# Altium PCB PnP.PcbDoc (part 4 of 5)
Units mm, origin at the board's own origin, x right, y up, seen from the top; angles counter-clockwise.
Board outline 95 x 65 mm, 6 copper layers (Top Layer, L2 - GND, L3 - PWR, L4 - Sig, L5 - GND, Bottom Layer), stack 1.538 mm thick; 358 components, 260 nets, 1269 pads, 686 vias.
Unrouted connection lines stored in the file: 161.
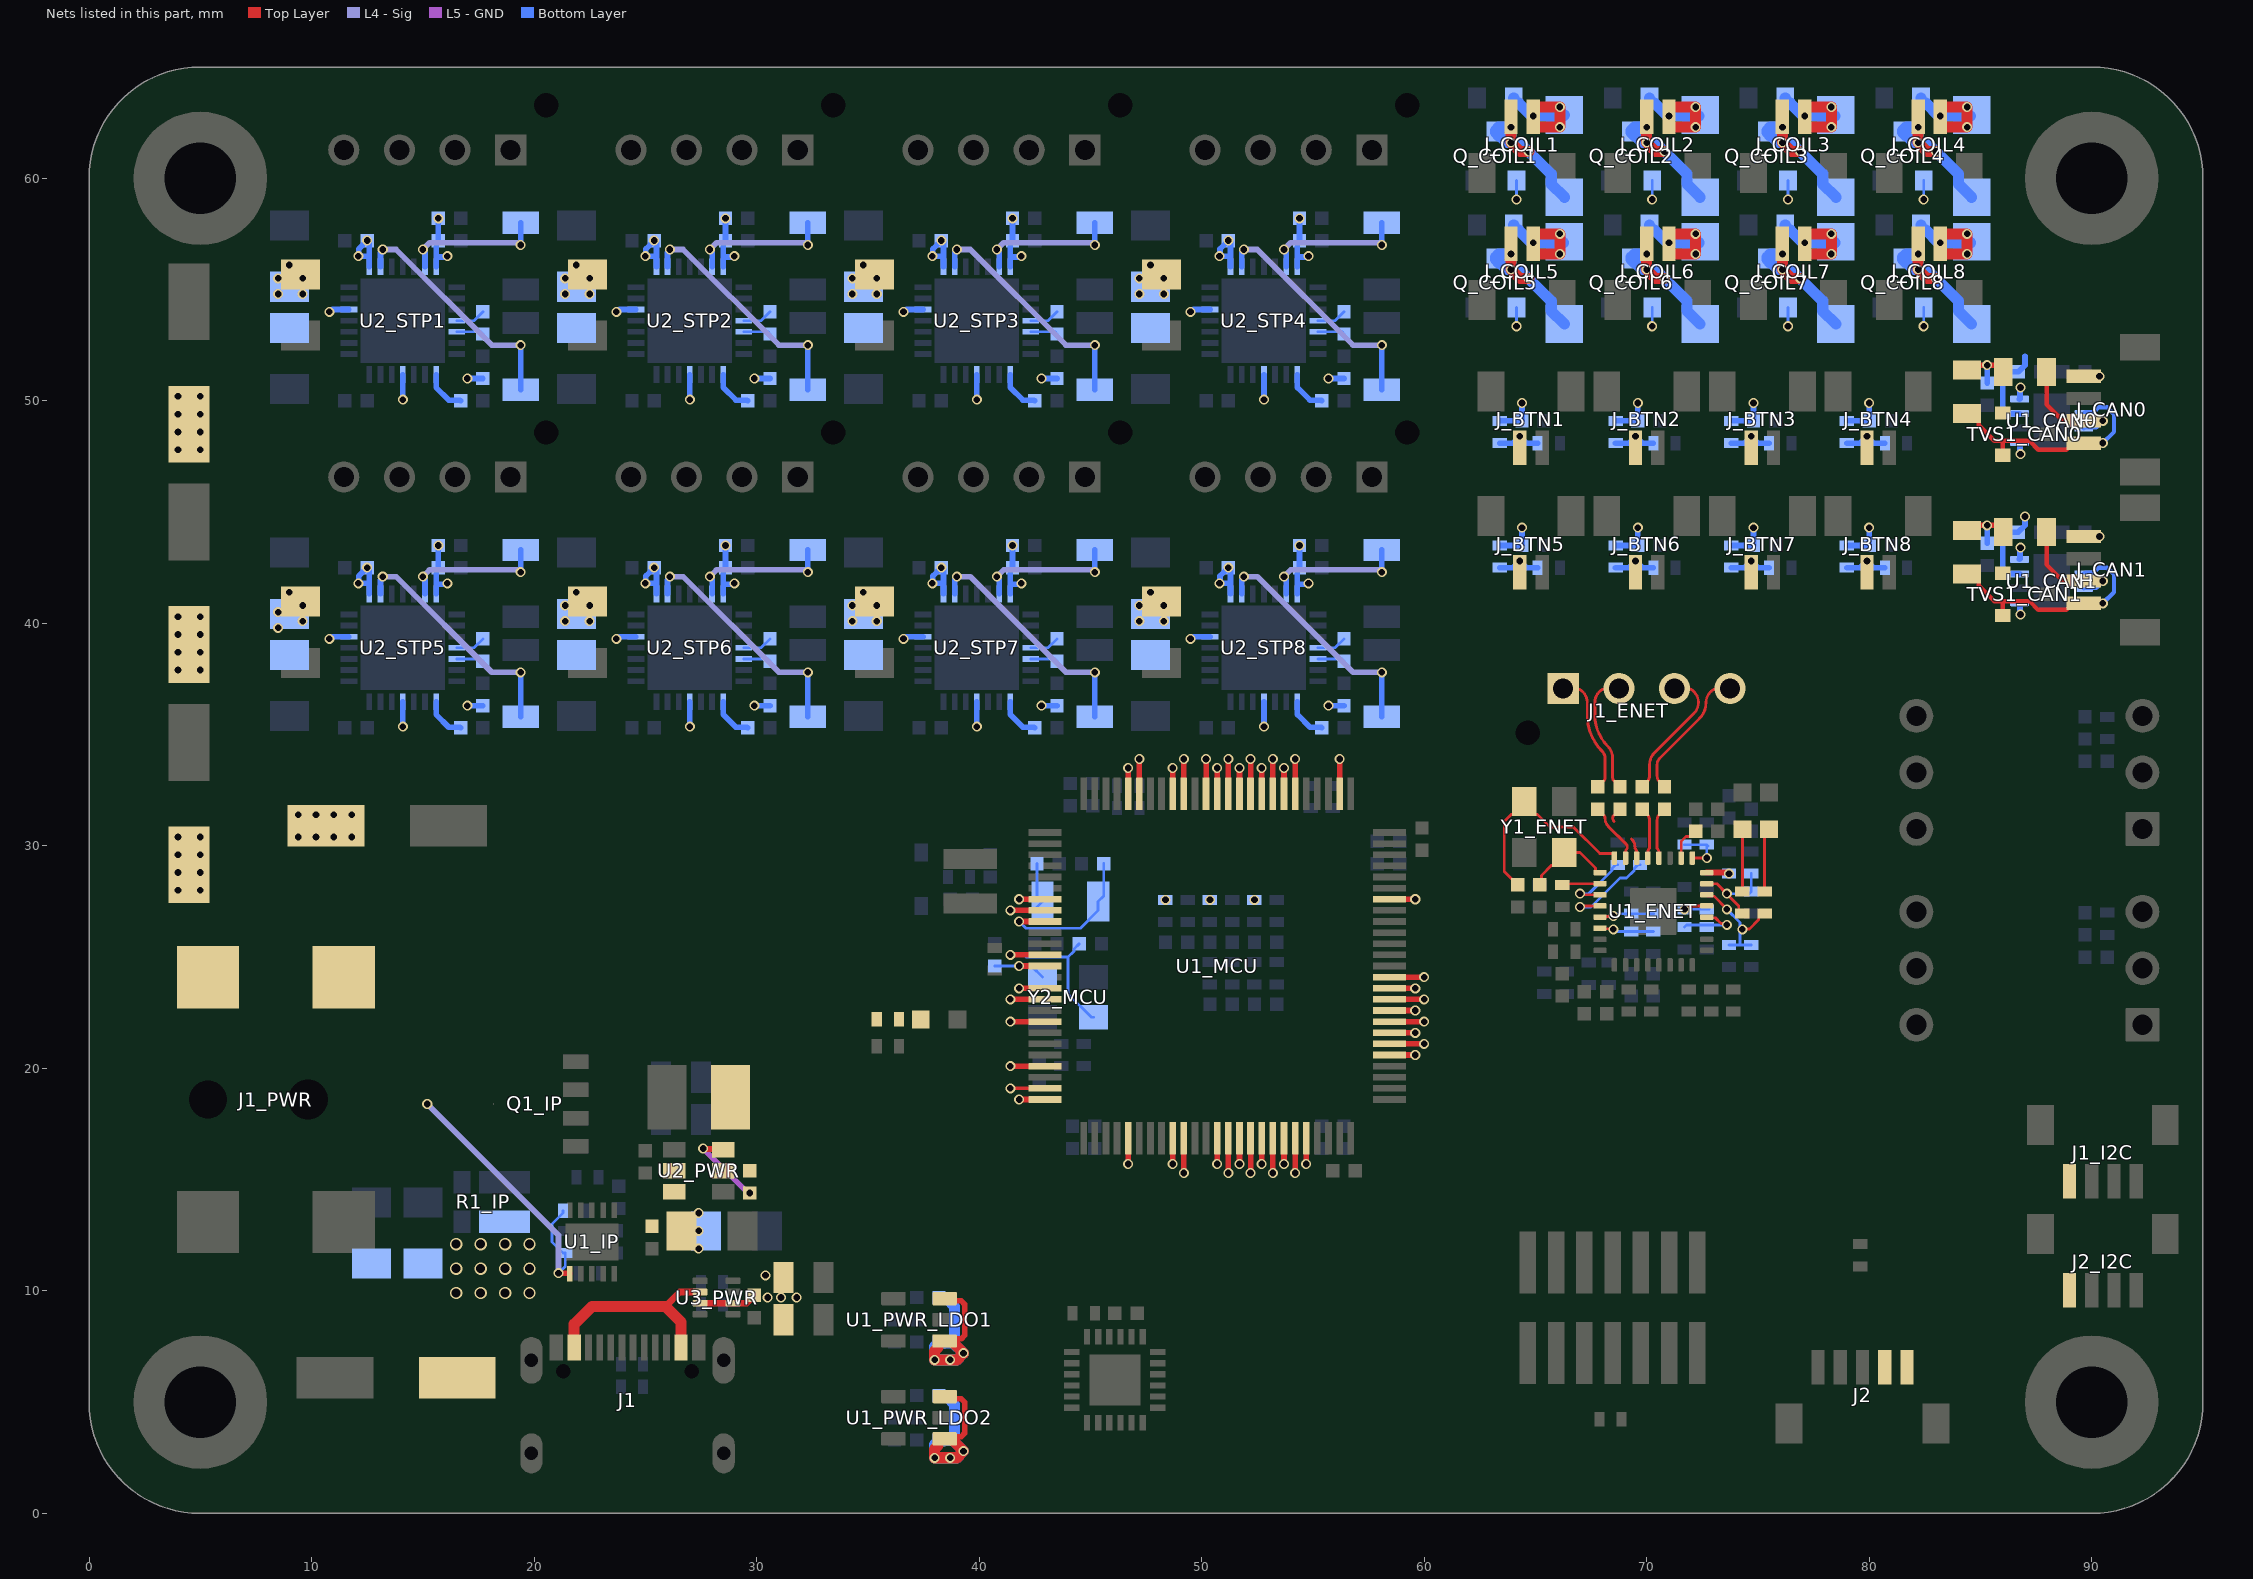
[diagram p7: the nets of this part, all layers, seen from the top]

## Via types
v1: diameter 0.45, hole 0.3, Top Layer to Bottom Layer, tented both sides, 674 vias
v2: diameter 0.55, hole 0.4, Top Layer to Bottom Layer, tented both sides, 12 vias

## Nets (pads, with @x,y where several pads share a name; then routed paths per layer and width w, separated by ;. In a path a pad name is that pad's centre, name@x,y a point inside that pad or via, vN(x,y) a via of type N, cw(c..) or ccw(c..) an arc to the next point about the centre after c; other vN are vias at no path point) (continued)
5V0_LOGIC: C1_PWR_LDO1.2 C1_PWR_LDO2.2 C2_CAN0.1 C2_CAN1.1 C2_PWR_LDO1.2 C2_PWR_LDO2.2 C21_PWR.2 C22_PWR.2 C23_PWR.2 R5_PWR.2 U1_CAN0.3 U1_CAN1.3 U1_PWR_LDO1.1 U1_PWR_LDO1.3 U1_PWR_LDO2.1 U1_PWR_LDO2.3 U3_PWR.2 U3_PWR.7 | length 37
  Top Layer w0.254: U1_PWR_LDO2.1@38.45,3.35 38.551,3.451 39.201,3.451 39.35,3.6 39.35,5 39.201,5.149 38.551,5.149 U1_PWR_LDO2.3@38.45,5.25 ; U1_PWR_LDO1.1@38.45,7.75 38.551,7.851 39.201,7.851 39.35,8 39.35,9.4 39.201,9.549 38.551,9.549 U1_PWR_LDO1.3@38.45,9.65
  Top Layer w0.3: U3_PWR.7@27.46,9.45 U3_PWR.2@28.94,9.45 29.55,9.45 C21_PWR.2@29.9,9.8
  Top Layer w0.5: v1(38,2.5) v1(38.7,2.5) 39,2.5 v1(39.3,2.8) 38.8,3.3 38.5,3.3 U1_PWR_LDO2.1@38.45,3.35 38.2,3.35 38.15,3.3 38.15,3.05 38,2.9 v1(38,2.5) ; v1(38,6.9) 38,7.3 38.15,7.45 38.15,7.7 38.2,7.75 U1_PWR_LDO1.1@38.45,7.75 38.5,7.7 38.8,7.7 v1(39.3,7.2) 39,6.9 v1(38.7,6.9) v1(38,6.9)
  Bottom Layer w0.254: U1_CAN1.3@86.755,42.225 86.149,42.225 86,42.374 86,43.951 86.149,44.1 C2_CAN1.1@86.7,44.1 87,44.4 v1(87,44.8) ; U1_CAN0.3@86.755,49.425 86.149,49.425 86,49.574 86,51.151 86.149,51.3 C2_CAN0.1@86.7,51.3 87,51.6 87,52
  Bottom Layer w0.5: C1_PWR_LDO2.2@38.2,5.3 38.25,5.25 38.55,5.25 38.9,4.9 38.9,3.339 38.83,3.27 ; C2_PWR_LDO1.2@38.2,9.7 38.25,9.65 38.55,9.65 38.9,9.3 38.9,7.739 38.83,7.67 ; 38.83,3.27 v1(39.3,2.8) 39,2.5 v1(38.7,2.5) v1(38,2.5) 38,3.1 C2_PWR_LDO2.2@38.2,3.3 38.23,3.27 38.83,3.27 ; 38.83,7.67 38.23,7.67 C1_PWR_LDO1.2@38.2,7.7 38,7.5 v1(38,6.9) v1(38.7,6.9) 39,6.9 v1(39.3,7.2) 38.83,7.67
  other v1: 30.5,9.7 31.1,9.7 31.8,9.7 30.4,10.7 52.375,27.575
5V0_USB: J1.A4 J1.B4 U3_PWR.6 | length 9.4
  Top Layer w0.3: 25.9,9.3 26.55,9.95 U3_PWR.6@27.46,9.95
  Top Layer w0.5: J1.A4@21.8,7.455 21.8,8.5 22.6,9.3 25.9,9.3 26.6,8.6 J1.B4@26.6,7.455
5VOUT_STP1: C6_STP1.2 U2_STP1.8 | length 1.9
  Bottom Layer w0.254: U2_STP1.8@15.6,51.176 15.6,50.6 16.168,50.032 16.668,50.032 C6_STP1.2@16.7,50
5VOUT_STP2: C6_STP2.2 U2_STP2.8 | length 1.9
  Bottom Layer w0.254: U2_STP2.8@28.5,51.176 28.5,50.6 29.068,50.032 29.568,50.032 C6_STP2.2@29.6,50
5VOUT_STP3: C6_STP3.2 U2_STP3.8 | length 1.9
  Bottom Layer w0.254: U2_STP3.8@41.4,51.176 41.4,50.6 41.968,50.032 42.468,50.032 C6_STP3.2@42.5,50
5VOUT_STP4: C6_STP4.2 U2_STP4.8 | length 1.9
  Bottom Layer w0.254: U2_STP4.8@54.3,51.176 54.3,50.6 54.868,50.032 55.368,50.032 C6_STP4.2@55.4,50
5VOUT_STP5: C6_STP5.2 U2_STP5.8 | length 1.9
  Bottom Layer w0.254: U2_STP5.8@15.6,36.477 15.6,35.9 16.168,35.332 16.668,35.332 C6_STP5.2@16.7,35.3
5VOUT_STP6: C6_STP6.2 U2_STP6.8 | length 1.9
  Bottom Layer w0.254: U2_STP6.8@28.5,36.477 28.5,35.9 29.068,35.332 29.568,35.332 C6_STP6.2@29.6,35.3
5VOUT_STP7: C6_STP7.2 U2_STP7.8 | length 1.9
  Bottom Layer w0.254: U2_STP7.8@41.4,36.477 41.4,35.9 41.968,35.332 42.468,35.332 C6_STP7.2@42.5,35.3
5VOUT_STP8: C6_STP8.2 U2_STP8.8 | length 1.9
  Bottom Layer w0.254: U2_STP8.8@54.3,36.477 54.3,35.9 54.868,35.332 55.368,35.332 C6_STP8.2@55.4,35.3
24V_IN: J1_PWR.1 Q1_IP.5 R1_PWR.2 R2_IP.2 R3_IP.2 U1_IP.1 | length 14
  Top Layer w0.254: v1(21.1,10.8) 21.112,10.787 21.598,10.787 21.6,10.786 U1_IP.1@21.6,10.775
  L4 - Sig w0.254: v1(15.2,18.4) 21.1,12.5 v1(21.1,10.8)
  Bottom Layer w0.127: v1(21.1,10.8) 21.4,11.1 R2_IP.2@21.4,11.7 21.3,11.7 20.8,12.2 20.8,13 21.3,13.5 R3_IP.2@21.3,13.6
  other v1: 48.375,27.575
24V_MAIN: C1_IP.1 C1_STP1.2 C1_STP2.2 C1_STP3.2 C1_STP4.2 C1_STP5.2 C1_STP6.2 C1_STP7.2 C1_STP8.2 C2_IP.2 C2_STP1.2 C2_STP2.2 C2_STP3.2 C2_STP4.2 C2_STP5.2 C2_STP6.2 C2_STP7.2 C2_STP8.2 C3_IP.2 C3_STP1.2 C3_STP2.2 C3_STP3.2 C3_STP4.2 C3_STP5.2 C3_STP6.2 C3_STP7.2 C3_STP8.2 C4_STP1.2 C4_STP2.2 C4_STP3.2 C4_STP4.2 C4_STP5.2 C4_STP6.2 C4_STP7.2 C4_STP8.2 C8_STP1.2 C8_STP2.2 C8_STP3.2 C8_STP4.2 C8_STP5.2 C8_STP6.2 C8_STP7.2 C8_STP8.2 C9_PWR.1 C9_STP1.2 C9_STP2.2 C9_STP3.2 C9_STP4.2 C9_STP5.2 C9_STP6.2 C9_STP7.2 C9_STP8.2 C10_PWR.2 C10_STP1.2 C10_STP2.2 C10_STP3.2 C10_STP4.2 C10_STP5.2 C10_STP6.2 C10_STP7.2 C10_STP8.2 C11_PWR.2 C17_PWR.1 C18_PWR.1 C19_PWR.1 C20_PWR.1 C_COIL1.2 C_COIL2.2 C_COIL3.2 C_COIL4.2 C_COIL5.2 C_COIL6.2 C_COIL7.2 C_COIL8.2 D_COIL1.1 D_COIL2.1 D_COIL3.1 D_COIL4.1 D_COIL5.1 D_COIL6.1 D_COIL7.1 D_COIL8.1 J1_I2C.1 J2_I2C.1 J_CAN0.1 J_CAN1.1 J_COIL1.1 J_COIL2.1 J_COIL3.1 J_COIL4.1 J_COIL5.1 J_COIL6.1 J_COIL7.1 J_COIL8.1 R1_IP.2 R2_PWR.2 U2_PWR.2 U2_PWR.3 U2_STP1.22 U2_STP1.28 U2_STP2.22 U2_STP2.28 U2_STP3.22 U2_STP3.28 U2_STP4.22 U2_STP4.28 U2_STP5.22 U2_STP5.28 U2_STP6.22 U2_STP6.28 U2_STP7.22 U2_STP7.28 U2_STP8.22 U2_STP8.28 | length 102.7
  Top Layer w0.127: J_CAN0.1@89.637,51.1 v1(90.352,51.1)
  Top Layer w0.5: J_COIL5.1@64.9,56.65 J_COIL5.1@64.9,57.063 64.9,57.45 64.95,57.5 v1(66.1,57.5) v1(66.1,56.6) 64.95,56.6 J_COIL5.1@64.9,56.65 ; J_COIL1.1@64.9,62.35 J_COIL1.1@64.9,62.763 64.9,63.15 64.95,63.2 v1(66.1,63.2) v1(66.1,62.3) 64.95,62.3 J_COIL1.1@64.9,62.35 ; J_COIL6.1@71,56.65 J_COIL6.1@71,57.063 71,57.45 71.05,57.5 v1(72.2,57.5) v1(72.2,56.6) 71.05,56.6 J_COIL6.1@71,56.65 ; J_COIL2.1@71,62.35 J_COIL2.1@71,62.762 71,63.15 71.05,63.2 v1(72.2,63.2) v1(72.2,62.3) 71.05,62.3 J_COIL2.1@71,62.35 ; J_COIL7.1@77.1,56.65 J_COIL7.1@77.1,57.063 77.1,57.45 77.15,57.5 v1(78.3,57.5) v1(78.3,56.6) 77.15,56.6 J_COIL7.1@77.1,56.65 ; J_COIL3.1@77.1,62.35 J_COIL3.1@77.1,62.763 77.1,63.15 77.15,63.2 v1(78.3,63.2) v1(78.3,62.3) 77.15,62.3 J_COIL3.1@77.1,62.35 ; J_COIL8.1@83.2,56.65 J_COIL8.1@83.2,57.063 83.2,57.45 83.25,57.5 v1(84.4,57.5) v1(84.4,56.6) 83.25,56.6 J_COIL8.1@83.2,56.65 ; J_COIL4.1@83.2,62.35 J_COIL4.1@83.2,62.763 83.2,63.15 83.25,63.2 v1(84.4,63.2) v1(84.4,62.3) 83.25,62.3 J_COIL4.1@83.2,62.35
  Bottom Layer w0.254: v1(12.1,41.8) 12.6,41.8 ; v1@12.1,41.82 12.125,41.844 12.125,42.125 v1(12.5,42.5) 12.6,42.4 12.6,41.8 ; v1(12.1,56.5) 12.6,56.5 ; v1@12.1,56.52 12.125,56.544 12.125,56.825 v1(12.5,57.2) 12.6,57.1 12.6,56.5 ; U2_STP5.22@12.6,41.323 12.6,41.8 ; U2_STP1.22@12.6,56.023 12.6,56.5 ; U2_STP5.28@15.6,41.323 15.6,41.763 ; U2_STP1.28@15.6,56.023 15.6,56.463 ; v1(15.7,43.5) C2_STP5.2@15.7,42.5 15.6,42.4 15.6,41.763 ; v1(15.7,58.2) C2_STP1.2@15.7,57.2 15.6,57.1 15.6,56.463 ; v1(16.1,41.8) 16.063,41.763 15.6,41.763 ; v1(16.1,56.5) 16.063,56.463 15.6,56.463 ; v1(17,36.3) C4_STP5.2@17.7,36.3 ; v1(17,51) C4_STP1.2@17.7,51 ; v1(25,41.8) 25.5,41.8 ; v1@25,41.82 25.025,41.844 25.025,42.125 v1(25.4,42.5) 25.5,42.4 25.5,41.8 ; v1(25,56.5) 25.5,56.5 ; v1@25,56.52 25.025,56.544 25.025,56.825 v1(25.4,57.2) 25.5,57.1 25.5,56.5 ; U2_STP6.22@25.5,41.323 25.5,41.8 ; U2_STP2.22@25.5,56.023 25.5,56.5 ; U2_STP6.28@28.5,41.323 28.5,41.763 ; U2_STP2.28@28.5,56.023 28.5,56.463 ; v1(28.6,43.5) C2_STP6.2@28.6,42.5 28.5,42.4 28.5,41.763 ; v1(28.6,58.2) C2_STP2.2@28.6,57.2 28.5,57.1 28.5,56.463 ; v1(29,41.8) 28.963,41.763 28.5,41.763 ; v1(29,56.5) 28.963,56.463 28.5,56.463 ; v1(29.9,36.3) C4_STP6.2@30.6,36.3 ; v1(29.9,51) C4_STP2.2@30.6,51 ; v1(37.9,41.8) 38.4,41.8 ; v1@37.9,41.82 37.925,41.844 37.925,42.125 v1(38.3,42.5) 38.4,42.4 38.4,41.8 ; v1(37.9,56.5) 38.4,56.5 ; v1@37.9,56.52 37.925,56.544 37.925,56.825 v1(38.3,57.2) 38.4,57.1 38.4,56.5 ; U2_STP7.22@38.4,41.323 38.4,41.8 ; U2_STP3.22@38.4,56.023 38.4,56.5 ; U2_STP7.28@41.4,41.323 41.4,41.763 ; U2_STP3.28@41.4,56.023 41.4,56.463 ; v1(41.5,43.5) C2_STP7.2@41.5,42.5 41.4,42.4 41.4,41.763 ; v1(41.5,58.2) C2_STP3.2@41.5,57.2 41.4,57.1 41.4,56.463 ; v1(41.9,41.8) 41.863,41.763 41.4,41.763 ; v1(41.9,56.5) 41.863,56.463 41.4,56.463 ; v1(42.8,36.3) C4_STP7.2@43.5,36.3 ; v1(42.8,51) C4_STP3.2@43.5,51 ; v1(50.8,41.8) 51.3,41.8 ; v1@50.8,41.82 50.825,41.844 50.825,42.125 v1(51.2,42.5) 51.3,42.4 51.3,41.8 ; v1(50.8,56.5) 51.3,56.5 ; v1@50.8,56.52 50.825,56.544 50.825,56.825 v1(51.2,57.2) 51.3,57.1 51.3,56.5 ; U2_STP8.22@51.3,41.323 51.3,41.8 ; U2_STP4.22@51.3,56.023 51.3,56.5 ; U2_STP8.28@54.3,41.323 54.3,41.763 ; U2_STP4.28@54.3,56.023 54.3,56.463 ; v1(54.4,43.5) C2_STP8.2@54.4,42.5 54.3,42.4 54.3,41.763 ; v1(54.4,58.2) C2_STP4.2@54.4,57.2 54.3,57.1 54.3,56.463 ; v1(54.8,41.8) 54.763,41.763 54.3,41.763 ; v1(54.8,56.5) 54.763,56.463 54.3,56.463 ; v1(55.7,36.3) C4_STP8.2@56.4,36.3 ; v1(55.7,51) C4_STP4.2@56.4,51
  Bottom Layer w0.5: C_COIL5.2@64.025,57.9 64.025,57.825 64.175,57.675 64.25,57.675 64.825,57.1 v1(64.9,57.1) D_COIL5.1@66.25,57.1 ; C_COIL1.2@64.025,63.6 64.025,63.525 64.175,63.375 64.25,63.375 64.825,62.8 v1(64.9,62.8) 66.25,62.8 D_COIL1.1@66.3,62.85 ; C_COIL6.2@70.125,57.9 70.125,57.825 70.275,57.675 70.35,57.675 70.925,57.1 v1(71,57.1) D_COIL6.1@72.35,57.1 ; C_COIL2.2@70.125,63.6 70.125,63.525 70.275,63.375 70.35,63.375 70.925,62.8 v1(71,62.8) D_COIL2.1@72.35,62.8 ; C_COIL7.2@76.225,57.9 76.225,57.825 76.375,57.675 76.45,57.675 77.025,57.1 v1(77.1,57.1) D_COIL7.1@78.45,57.1 ; C_COIL3.2@76.225,63.6 76.225,63.525 76.375,63.375 76.45,63.375 77.025,62.8 v1(77.1,62.8) D_COIL3.1@78.45,62.8 ; C_COIL8.2@82.325,57.9 82.325,57.825 82.475,57.675 82.55,57.675 83.125,57.1 v1(83.2,57.1) D_COIL8.1@84.55,57.1 ; C_COIL4.2@82.325,63.6 82.325,63.525 82.475,63.375 82.55,63.375 83.125,62.8 v1(83.2,62.8) D_COIL4.1@84.55,62.8
  other v1: 27.4,11.9 27.4,12.7 27.4,13.5 50.375,27.575 4,28 5,28 4,28.8 5,28.8 4,29.6 5,29.6 4,30.4 5,30.4 9.4,30.4 10.2,30.4 11,30.4 11.8,30.4 9.4,31.4 10.2,31.4 11,31.4 11.8,31.4 4,37.9 5,37.9 4,38.7 5,38.7 4,39.5 5,39.5 8.5,39.8 9.6,40.1 21.4,40.1 22.5,40.1 34.3,40.1 35.4,40.1 47.2,40.1 48.3,40.1 4,40.3 5,40.3 8.5,40.5 9.6,40.8 21.4,40.8 22.5,40.8 34.3,40.8 35.4,40.8 47.2,40.8 48.3,40.8 9,41.4 21.9,41.4 34.8,41.4 47.7,41.4 90.352,43.9 4,47.8 5,47.8 4,48.6 5,48.6 4,49.4 5,49.4 4,50.2 5,50.2 8.5,54.8 9.6,54.8 21.4,54.8 22.5,54.8 34.3,54.8 35.4,54.8 47.2,54.8 48.3,54.8 8.5,55.5 9.6,55.5 21.4,55.5 22.5,55.5 34.3,55.5 35.4,55.5 47.2,55.5 48.3,55.5 9,56.1 21.9,56.1 34.8,56.1 47.7,56.1
  other v2: 16.5,9.9 17.6,9.9 18.7,9.9 19.8,9.9 16.5,11 17.6,11 18.7,11 19.8,11 16.5,12.1 17.6,12.1 18.7,12.1 19.8,12.1
BRA_STP1: R1_STP1.1 U2_STP1.23 | length 10.8
  L4 - Sig w0.254: v1(13.2,56.8) 13.8,56.8 18.1,52.5 v1(19.4,52.5)
  Bottom Layer w0.254: U2_STP1.23@13.1,56.023 13.1,56.647 13.2,56.747 v1(13.2,56.8) ; R1_STP1.1@19.4,50.5 v1(19.4,52.5)
BRA_STP2: R1_STP2.1 U2_STP2.23 | length 10.8
  L4 - Sig w0.254: v1(26.1,56.8) 26.7,56.8 31,52.5 v1(32.3,52.5)
  Bottom Layer w0.254: U2_STP2.23@26,56.023 26,56.647 26.1,56.747 v1(26.1,56.8) ; R1_STP2.1@32.3,50.5 v1(32.3,52.5)
BRA_STP3: R1_STP3.1 U2_STP3.23 | length 10.8
  L4 - Sig w0.254: v1(39,56.8) 39.6,56.8 43.9,52.5 v1(45.2,52.5)
  Bottom Layer w0.254: U2_STP3.23@38.9,56.023 38.9,56.647 39,56.747 v1(39,56.8) ; R1_STP3.1@45.2,50.5 v1(45.2,52.5)
BRA_STP4: R1_STP4.1 U2_STP4.23 | length 10.8
  L4 - Sig w0.254: v1(51.9,56.8) 52.5,56.8 56.8,52.5 v1(58.1,52.5)
  Bottom Layer w0.254: U2_STP4.23@51.8,56.023 51.8,56.647 51.9,56.747 v1(51.9,56.8) ; R1_STP4.1@58.1,50.5 v1(58.1,52.5)
BRA_STP5: R1_STP5.1 U2_STP5.23 | length 10.8
  L4 - Sig w0.254: v1(13.2,42.1) 13.8,42.1 18.1,37.8 v1(19.4,37.8)
  Bottom Layer w0.254: U2_STP5.23@13.1,41.323 13.1,41.947 13.2,42.047 v1(13.2,42.1) ; R1_STP5.1@19.4,35.8 v1(19.4,37.8)
BRA_STP6: R1_STP6.1 U2_STP6.23 | length 10.8
  L4 - Sig w0.254: v1(26.1,42.1) 26.7,42.1 31,37.8 v1(32.3,37.8)
  Bottom Layer w0.254: U2_STP6.23@26,41.323 26,41.947 26.1,42.047 v1(26.1,42.1) ; R1_STP6.1@32.3,35.8 v1(32.3,37.8)
BRA_STP7: R1_STP7.1 U2_STP7.23 | length 10.8
  L4 - Sig w0.254: v1(39,42.1) 39.6,42.1 43.9,37.8 v1(45.2,37.8)
  Bottom Layer w0.254: U2_STP7.23@38.9,41.323 38.9,41.947 39,42.047 v1(39,42.1) ; R1_STP7.1@45.2,35.8 v1(45.2,37.8)
BRA_STP8: R1_STP8.1 U2_STP8.23 | length 10.8
  L4 - Sig w0.254: v1(51.9,42.1) 52.5,42.1 56.8,37.8 v1(58.1,37.8)
  Bottom Layer w0.254: U2_STP8.23@51.8,41.323 51.8,41.947 51.9,42.047 v1(51.9,42.1) ; R1_STP8.1@58.1,35.8 v1(58.1,37.8)
BRB_STP1: R2_STP1.1 U2_STP1.27 | length 6.4
  L4 - Sig w0.254: v1(15,56.8) 15.3,57.1 19.247,57.1 19.347,57 v1(19.4,57)
  Bottom Layer w0.254: v1(15,56.8) 15,56.747 15.1,56.647 U2_STP1.27@15.1,56.023 ; v1(19.4,57) R2_STP1.1@19.4,58
BRB_STP2: R2_STP2.1 U2_STP2.27 | length 6.4
  L4 - Sig w0.254: v1(27.9,56.8) 28.2,57.1 32.147,57.1 32.247,57 v1(32.3,57)
  Bottom Layer w0.254: v1(27.9,56.8) 27.9,56.747 28,56.647 U2_STP2.27@28,56.023 ; v1(32.3,57) R2_STP2.1@32.3,58
BRB_STP3: R2_STP3.1 U2_STP3.27 | length 6.4
  L4 - Sig w0.254: v1(40.8,56.8) 41.1,57.1 45.047,57.1 45.147,57 v1(45.2,57)
  Bottom Layer w0.254: v1(40.8,56.8) 40.8,56.747 40.9,56.647 U2_STP3.27@40.9,56.023 ; v1(45.2,57) R2_STP3.1@45.2,58
BRB_STP4: R2_STP4.1 U2_STP4.27 | length 6.4
  L4 - Sig w0.254: v1(53.7,56.8) 54,57.1 57.947,57.1 58.047,57 v1(58.1,57)
  Bottom Layer w0.254: v1(53.7,56.8) 53.7,56.747 53.8,56.647 U2_STP4.27@53.8,56.023 ; v1(58.1,57) R2_STP4.1@58.1,58
BRB_STP5: R2_STP5.1 U2_STP5.27 | length 6.4
  L4 - Sig w0.254: v1(15,42.1) 15.3,42.4 19.247,42.4 19.347,42.3 v1(19.4,42.3)
  Bottom Layer w0.254: v1(15,42.1) 15,42.047 15.1,41.947 U2_STP5.27@15.1,41.323 ; v1(19.4,42.3) R2_STP5.1@19.4,43.3
BRB_STP6: R2_STP6.1 U2_STP6.27 | length 6.4
  L4 - Sig w0.254: v1(27.9,42.1) 28.2,42.4 32.147,42.4 32.247,42.3 v1(32.3,42.3)
  Bottom Layer w0.254: v1(27.9,42.1) 27.9,42.047 28,41.947 U2_STP6.27@28,41.323 ; v1(32.3,42.3) R2_STP6.1@32.3,43.3
BRB_STP7: R2_STP7.1 U2_STP7.27 | length 6.4
  L4 - Sig w0.254: v1(40.8,42.1) 41.1,42.4 45.047,42.4 45.147,42.3 v1(45.2,42.3)
  Bottom Layer w0.254: v1(40.8,42.1) 40.8,42.047 40.9,41.947 U2_STP7.27@40.9,41.323 ; v1(45.2,42.3) R2_STP7.1@45.2,43.3
BRB_STP8: R2_STP8.1 U2_STP8.27 | length 6.4
  L4 - Sig w0.254: v1(53.7,42.1) 54,42.4 57.947,42.4 58.047,42.3 v1(58.1,42.3)
  Bottom Layer w0.254: v1(53.7,42.1) 53.7,42.047 53.8,41.947 U2_STP8.27@53.8,41.323 ; v1(58.1,42.3) R2_STP8.1@58.1,43.3
BTN1: C1_BTN1.2 R2_BTN1.1 U1_MCU.81 | length 3.4
  Top Layer w0.254: U1_MCU.81@54.2,32.338 v1(54.2,33.9)
  Bottom Layer w0.254: R2_BTN1.1@63.4,49.1 C1_BTN1.2@64.4,49.1 v1(64.4,49.9)
BTN2: C1_BTN2.2 R2_BTN2.1 U1_MCU.82 | length 3
  Top Layer w0.254: U1_MCU.82@53.7,32.338 v1(53.7,33.5)
  Bottom Layer w0.254: R2_BTN2.1@68.6,49.1 C1_BTN2.2@69.6,49.1 v1(69.6,49.9)
BTN3: C1_BTN3.2 R2_BTN3.1 U1_MCU.83 | length 3.4
  Top Layer w0.254: U1_MCU.83@53.2,32.338 v1(53.2,33.9)
  Bottom Layer w0.254: R2_BTN3.1@73.8,49.1 C1_BTN3.2@74.8,49.1 v1(74.8,49.9)
BTN4: C1_BTN4.2 R2_BTN4.1 U1_MCU.84 | length 3
  Top Layer w0.254: U1_MCU.84@52.7,32.338 v1(52.7,33.5)
  Bottom Layer w0.254: R2_BTN4.1@79,49.1 C1_BTN4.2@80,49.1 v1(80,49.9)
BTN5: C1_BTN5.2 R2_BTN5.1 U1_MCU.85 | length 3.4
  Top Layer w0.254: U1_MCU.85@52.2,32.338 v1(52.2,33.9)
  Bottom Layer w0.254: R2_BTN5.1@63.4,43.5 C1_BTN5.2@64.4,43.5 v1(64.4,44.3)
BTN6: C1_BTN6.2 R2_BTN6.1 U1_MCU.86 | length 3
  Top Layer w0.254: U1_MCU.86@51.7,32.338 v1(51.7,33.5)
  Bottom Layer w0.254: R2_BTN6.1@68.6,43.5 C1_BTN6.2@69.6,43.5 v1(69.6,44.3)
BTN7: C1_BTN7.2 R2_BTN7.1 U1_MCU.87 | length 3.4
  Top Layer w0.254: U1_MCU.87@51.2,32.338 v1(51.2,33.9)
  Bottom Layer w0.254: R2_BTN7.1@73.8,43.5 C1_BTN7.2@74.8,43.5 v1(74.8,44.3)
BTN8: C1_BTN8.2 R2_BTN8.1 U1_MCU.88 | length 3
  Top Layer w0.254: U1_MCU.88@50.7,32.338 v1(50.7,33.5)
  Bottom Layer w0.254: R2_BTN8.1@79,43.5 C1_BTN8.2@80,43.5 v1(80,44.3)
BTN_R_BTN1: J_BTN1.1 R1_BTN1.1 R2_BTN1.2 | length 1.9
  Bottom Layer w0.254: R2_BTN1.2@63.4,48.1 64,48.1 v1(64.3,48.4) 64.6,48.1 R1_BTN1.1@65.1,48.1
BTN_R_BTN2: J_BTN2.1 R1_BTN2.1 R2_BTN2.2 | length 1.9
  Bottom Layer w0.254: R2_BTN2.2@68.6,48.1 69.2,48.1 v1(69.5,48.4) 69.8,48.1 R1_BTN2.1@70.3,48.1
BTN_R_BTN3: J_BTN3.1 R1_BTN3.1 R2_BTN3.2 | length 1.9
  Bottom Layer w0.254: R2_BTN3.2@73.8,48.1 74.4,48.1 v1(74.7,48.4) 75,48.1 R1_BTN3.1@75.5,48.1
BTN_R_BTN4: J_BTN4.1 R1_BTN4.1 R2_BTN4.2 | length 1.9
  Bottom Layer w0.254: R2_BTN4.2@79,48.1 79.6,48.1 v1(79.9,48.4) 80.2,48.1 R1_BTN4.1@80.7,48.1
BTN_R_BTN5: J_BTN5.1 R1_BTN5.1 R2_BTN5.2 | length 1.9
  Bottom Layer w0.254: R2_BTN5.2@63.4,42.5 64,42.5 v1(64.3,42.8) 64.6,42.5 R1_BTN5.1@65.1,42.5
BTN_R_BTN6: J_BTN6.1 R1_BTN6.1 R2_BTN6.2 | length 1.9
  Bottom Layer w0.254: R2_BTN6.2@68.6,42.5 69.2,42.5 v1(69.5,42.8) 69.8,42.5 R1_BTN6.1@70.3,42.5
BTN_R_BTN7: J_BTN7.1 R1_BTN7.1 R2_BTN7.2 | length 1.9
  Bottom Layer w0.254: R2_BTN7.2@73.8,42.5 74.4,42.5 v1(74.7,42.8) 75,42.5 R1_BTN7.1@75.5,42.5
BTN_R_BTN8: J_BTN8.1 R1_BTN8.1 R2_BTN8.2 | length 1.9
  Bottom Layer w0.254: R2_BTN8.2@79,42.5 79.6,42.5 v1(79.9,42.8) 80.2,42.5 R1_BTN8.1@80.7,42.5
BUCK_5V_BST: C5_PWR.2 U2_PWR.6 | length 3.8
  Top Layer w0.254: v1(27.6,16.4) 27.625,16.375 28.475,16.375 U2_PWR.6@28.5,16.35
  L5 - GND w0.254: v1(27.6,16.4) 29.562,14.438 29.662,14.438 v1(29.7,14.4)
BUCK_5V_SW: C5_PWR.1 L1_PWR.1 U2_PWR.5
CAN0_MCU_TO_PHY_DATA: U1_CAN0.1 U1_MCU.96 | length 1.7
  Top Layer w0.254: U1_MCU.96@46.7,32.338 v1(46.7,33.5)
  Bottom Layer w0.254: U1_CAN0.1@86.755,48.125 86.777,48.103 86.777,47.623 v1(86.8,47.6)
CAN0_PHY_TO_MCU_DATA: U1_CAN0.4 U1_MCU.95 | length 2.1
  Top Layer w0.254: U1_MCU.95@47.2,32.338 v1(47.2,33.9)
  Bottom Layer w0.254: U1_CAN0.4@86.755,50.075 86.777,50.097 86.777,50.577 v1(86.8,50.6)
CAN1_MCU_TO_PHY_DATA: U1_CAN1.1 U1_MCU.92 | length 1.7
  Top Layer w0.254: U1_MCU.92@48.7,32.338 v1(48.7,33.5)
  Bottom Layer w0.254: U1_CAN1.1@86.755,40.925 86.777,40.902 86.777,40.422 v1(86.8,40.4)
CAN1_PHY_TO_MCU_DATA: U1_CAN1.4 U1_MCU.91 | length 2.1
  Top Layer w0.254: U1_MCU.91@49.2,32.338 v1(49.2,33.9)
  Bottom Layer w0.254: U1_CAN1.4@86.755,42.875 86.777,42.897 86.777,43.377 v1(86.8,43.4)
CAN_CAN0_H: J_CAN0.3 R1_CAN0.2 TVS1_CAN0.1 U1_CAN0.7 | length 4.4
  Top Layer w0.2: R1_CAN0.2@87.975,51.3 87.975,49.825 88.68,49.12 89.617,49.12 J_CAN0.3@89.637,49.1
  Bottom Layer w0.2: U1_CAN0.7@89.645,48.775 89.67,48.8 90.2,48.8 v1(90.5,49.1)
CAN_CAN0_L: J_CAN0.4 R2_CAN0.1 TVS1_CAN0.2 U1_CAN0.6 | length 9.9
  Top Layer w0.2: R2_CAN0.1@84.4,49.425 84.6,49.425 84.925,49.1 84.925,48.9 85.625,48.2 86,48.2 ; TVS1_CAN0.2@86,47.55 86,48.2 ; J_CAN0.4@89.637,48.1 89.162,48.1 88.862,47.8 87.6,47.8 87.2,48.2 86,48.2
  Bottom Layer w0.2: U1_CAN0.6@89.645,49.425 89.705,49.485 90.085,49.485 90.3,49.7 90.7,49.7 91,49.4 91,48.6 v1(90.5,48.1)
CAN_CAN1_H: J_CAN1.3 R1_CAN1.2 TVS1_CAN1.1 U1_CAN1.7 | length 4.4
  Top Layer w0.2: R1_CAN1.2@87.975,44.1 87.975,42.625 88.68,41.92 89.617,41.92 J_CAN1.3@89.637,41.9
  Bottom Layer w0.2: U1_CAN1.7@89.645,41.575 89.67,41.6 90.2,41.6 v1(90.5,41.9)
CAN_CAN1_L: J_CAN1.4 R2_CAN1.1 TVS1_CAN1.2 U1_CAN1.6 | length 9.9
  Top Layer w0.2: R2_CAN1.1@84.4,42.225 84.6,42.225 84.925,41.9 84.925,41.7 85.625,41 86,41 ; TVS1_CAN1.2@86,40.35 86,41 ; J_CAN1.4@89.637,40.9 89.162,40.9 88.862,40.6 87.6,40.6 87.2,41 86,41
  Bottom Layer w0.2: U1_CAN1.6@89.645,42.225 89.705,42.285 90.085,42.285 90.3,42.5 90.7,42.5 91,42.2 91,41.4 v1(90.5,40.9)
CAN_TERM_CAN0: C3_CAN0.2 R1_CAN0.1 R2_CAN0.2 | length 2.6
  Top Layer w0.254: R2_CAN0.2@84.4,51.375 84.625,51.6 v1(85.3,51.6) 85.727,51.6 86.025,51.302 R1_CAN0.1@86.025,51.3
  Bottom Layer w0.254: C3_CAN0.2@85.3,50.8 v1(85.3,51.6)
CAN_TERM_CAN1: C3_CAN1.2 R1_CAN1.1 R2_CAN1.2 | length 2.6
  Top Layer w0.254: R2_CAN1.2@84.4,44.175 84.625,44.4 v1(85.3,44.4) 85.727,44.4 86.025,44.102 R1_CAN1.1@86.025,44.1
  Bottom Layer w0.254: C3_CAN1.2@85.3,43.6 v1(85.3,44.4)
CLK_25M_MCU_XI: C5_MCU.2 U1_MCU.12 Y2_MCU.1 | length 8.2
  Top Layer w0.254: v1(41.4,25.1) U1_MCU.12@42.962,25.1
  Bottom Layer w0.127: v1(41.4,25.1) 42,25.1 42.1,25 44,25 ; C5_MCU.2@44.5,25.6 44.264,25.364 44.264,25.263 44,25 ; Y2_MCU.1@45.15,22.3 45.05,22.3 44,23.35 44,25
CLK_25M_MCU_XO: C4_MCU.2 U1_MCU.13 Y2_MCU.3 | length 3.5
  Top Layer w0.254: v1(41.8,24.6) U1_MCU.13@42.962,24.6
  Bottom Layer w0.127: C4_MCU.2@40.7,24.6 v1(41.8,24.6) 42.189,24.6 42.203,24.587 42.363,24.587 Y2_MCU.3@42.85,24.1
CLK_32K_MCU_XI: C2_MCU.2 U1_MCU.8 Y1_MCU.1 | length 5
  Top Layer w0.254: v1(41.4,27.1) U1_MCU.8@42.962,27.1
  Bottom Layer w0.127: v1(41.4,27.1) 42.45,27.1 Y1_MCU.1@42.85,27.5 42.6,27.75 C2_MCU.2@42.6,29.2
CLK_32K_MCU_XO: C3_MCU.2 U1_MCU.9 Y1_MCU.2 | length 7.4
  Top Layer w0.254: v1(41.8,26.6) U1_MCU.9@42.962,26.6
  Bottom Layer w0.127: v1(41.8,26.6) 42.1,26.3 44.55,26.3 45.35,27.1 Y1_MCU.2@45.35,27.5 45.6,27.75 C3_MCU.2@45.6,29.2
COIL_LO_COIL1: D_COIL1.2 J_COIL1.2 Q_COIL1.3 | length 8.3
  Top Layer w0.254: v1(63.9,62.3) J_COIL1.2@63.9,62.763
  Top Layer w0.5: v1(63.9,62.3) v1(63.9,61.6) 64.3,61.2 v1(64.7,61.2)
  Bottom Layer w0.5: D_COIL1.2@66.3,59.15 65.71,59.74 65.71,60.19 v1(64.7,61.2) 64.3,61.6 v1(63.9,61.6) ; v1(63.9,61.6) v1(63.9,62.3) 63.35,62.3 63.2,62.15 Q_COIL1.3@63.2,62.1 63.2,62.05 63.35,61.9 63.4,61.9 63.7,61.6 v1(63.9,61.6)
COIL_LO_COIL2: D_COIL2.2 J_COIL2.2 Q_COIL2.3 | length 8.3
  Top Layer w0.254: v1(70,62.3) J_COIL2.2@70,62.762
  Top Layer w0.5: v1(70,62.3) v1(70,61.6) 70.4,61.2 v1(70.8,61.2)
  Bottom Layer w0.5: D_COIL2.2@72.4,59.15 71.81,59.74 71.81,60.19 v1(70.8,61.2) 70.4,61.6 v1(70,61.6) ; v1(70,61.6) v1(70,62.3) 69.45,62.3 69.3,62.15 Q_COIL2.3@69.3,62.1 69.3,62.05 69.45,61.9 69.5,61.9 69.8,61.6 v1(70,61.6)
COIL_LO_COIL3: D_COIL3.2 J_COIL3.2 Q_COIL3.3 | length 8.3
  Top Layer w0.254: v1(76.1,62.3) J_COIL3.2@76.1,62.763
  Top Layer w0.5: v1(76.1,62.3) v1(76.1,61.6) 76.5,61.2 v1(76.9,61.2)
  Bottom Layer w0.5: D_COIL3.2@78.5,59.15 77.91,59.74 77.91,60.19 v1(76.9,61.2) 76.5,61.6 v1(76.1,61.6) ; v1(76.1,61.6) v1(76.1,62.3) 75.55,62.3 75.4,62.15 Q_COIL3.3@75.4,62.1 75.4,62.05 75.55,61.9 75.6,61.9 75.9,61.6 v1(76.1,61.6)
COIL_LO_COIL4: D_COIL4.2 J_COIL4.2 Q_COIL4.3 | length 8.3
  Top Layer w0.254: v1(82.2,62.3) J_COIL4.2@82.2,62.763
  Top Layer w0.5: v1(82.2,62.3) v1(82.2,61.6) 82.6,61.2 v1(83,61.2)
  Bottom Layer w0.5: D_COIL4.2@84.6,59.15 84.01,59.74 84.01,60.19 v1(83,61.2) 82.6,61.6 v1(82.2,61.6) ; v1(82.2,61.6) v1(82.2,62.3) 81.65,62.3 81.5,62.15 Q_COIL4.3@81.5,62.1 81.5,62.05 81.65,61.9 81.7,61.9 82,61.6 v1(82.2,61.6)
COIL_LO_COIL5: D_COIL5.2 J_COIL5.2 Q_COIL5.3 | length 8.3
  Top Layer w0.254: v1(63.9,56.6) J_COIL5.2@63.9,57.063
  Top Layer w0.5: v1(63.9,56.6) v1(63.9,55.9) 64.3,55.5 v1(64.7,55.5)
  Bottom Layer w0.5: D_COIL5.2@66.3,53.45 65.71,54.04 65.71,54.49 v1(64.7,55.5) 64.3,55.9 v1(63.9,55.9) ; v1(63.9,55.9) v1(63.9,56.6) 63.35,56.6 63.2,56.45 Q_COIL5.3@63.2,56.4 63.2,56.35 63.35,56.2 63.4,56.2 63.7,55.9 v1(63.9,55.9)
COIL_LO_COIL6: D_COIL6.2 J_COIL6.2 Q_COIL6.3 | length 8.3
  Top Layer w0.254: v1(70,56.6) J_COIL6.2@70,57.063
  Top Layer w0.5: v1(70,56.6) v1(70,55.9) 70.4,55.5 v1(70.8,55.5)
  Bottom Layer w0.5: D_COIL6.2@72.4,53.45 71.81,54.04 71.81,54.49 v1(70.8,55.5) 70.4,55.9 v1(70,55.9) ; v1(70,55.9) v1(70,56.6) 69.45,56.6 69.3,56.45 Q_COIL6.3@69.3,56.4 69.3,56.35 69.45,56.2 69.5,56.2 69.8,55.9 v1(70,55.9)
COIL_LO_COIL7: D_COIL7.2 J_COIL7.2 Q_COIL7.3 | length 8.3
  Top Layer w0.254: v1(76.1,56.6) J_COIL7.2@76.1,57.063
  Top Layer w0.5: v1(76.1,56.6) v1(76.1,55.9) 76.5,55.5 v1(76.9,55.5)
  Bottom Layer w0.5: D_COIL7.2@78.5,53.45 77.91,54.04 77.91,54.49 v1(76.9,55.5) 76.5,55.9 v1(76.1,55.9) ; v1(76.1,55.9) v1(76.1,56.6) 75.55,56.6 75.4,56.45 Q_COIL7.3@75.4,56.4 75.4,56.35 75.55,56.2 75.6,56.2 75.9,55.9 v1(76.1,55.9)
COIL_LO_COIL8: D_COIL8.2 J_COIL8.2 Q_COIL8.3 | length 8.3
  Top Layer w0.254: v1(82.2,56.6) J_COIL8.2@82.2,57.063
  Top Layer w0.5: v1(82.2,56.6) v1(82.2,55.9) 82.6,55.5 v1(83,55.5)
  Bottom Layer w0.5: D_COIL8.2@84.6,53.45 84.01,54.04 84.01,54.49 v1(83,55.5) 82.6,55.9 v1(82.2,55.9) ; v1(82.2,55.9) v1(82.2,56.6) 81.65,56.6 81.5,56.45 Q_COIL8.3@81.5,56.4 81.5,56.35 81.65,56.2 81.7,56.2 82,55.9 v1(82.2,55.9)
COIL_PWM1: Q_COIL1.1 U1_MCU.77 | length 2.4
  Top Layer w0.254: U1_MCU.77@56.2,32.338 v1(56.2,33.9)
  Bottom Layer w0.127: v1(64.15,59.05) Q_COIL1.1@64.15,59.9
COIL_PWM2: Q_COIL2.1 U1_MCU.89 | length 2.4
  Top Layer w0.254: U1_MCU.89@50.2,32.338 v1(50.2,33.9)
  Bottom Layer w0.127: v1(70.25,59.05) Q_COIL2.1@70.25,59.9
COIL_PWM3: Q_COIL3.1 U1_MCU.46 | length 2
  Top Layer w0.254: v1(54.7,15.7) U1_MCU.46@54.7,16.862
  Bottom Layer w0.127: v1(76.35,59.05) Q_COIL3.1@76.35,59.9
COIL_PWM4: Q_COIL4.1 U1_MCU.30 | length 2
  Top Layer w0.254: v1(46.7,15.7) U1_MCU.30@46.7,16.862
  Bottom Layer w0.127: v1(82.45,59.05) Q_COIL4.1@82.45,59.9
COIL_PWM5: Q_COIL5.1 U1_MCU.34 | length 2
  Top Layer w0.254: v1(48.7,15.7) U1_MCU.34@48.7,16.862
  Bottom Layer w0.127: v1(64.15,53.35) Q_COIL5.1@64.15,54.2
COIL_PWM6: Q_COIL6.1 U1_MCU.35 | length 2.4
  Top Layer w0.254: v1(49.2,15.3) U1_MCU.35@49.2,16.862
  Bottom Layer w0.127: v1(70.25,53.35) Q_COIL6.1@70.25,54.2
COIL_PWM7: Q_COIL7.1 U1_MCU.22 | length 2.4
  Top Layer w0.254: v1(41.4,20.1) U1_MCU.22@42.962,20.1
  Bottom Layer w0.127: v1(76.35,53.35) Q_COIL7.1@76.35,54.2
COIL_PWM8: Q_COIL8.1 U1_MCU.25 | length 2
  Top Layer w0.254: v1(41.8,18.6) U1_MCU.25@42.962,18.6
  Bottom Layer w0.127: v1(82.45,53.35) Q_COIL8.1@82.45,54.2
CPI_STP1: C7_STP1.1 U2_STP1.5 | length 1.2
  Bottom Layer w0.127: U2_STP1.5@16.523,53.1 17.6,53.1 C7_STP1.1@17.7,53
CPI_STP2: C7_STP2.1 U2_STP2.5 | length 1.2
  Bottom Layer w0.127: U2_STP2.5@29.423,53.1 30.5,53.1 C7_STP2.1@30.6,53
CPI_STP3: C7_STP3.1 U2_STP3.5 | length 1.2
  Bottom Layer w0.127: U2_STP3.5@42.323,53.1 43.4,53.1 C7_STP3.1@43.5,53
CPI_STP4: C7_STP4.1 U2_STP4.5 | length 1.2
  Bottom Layer w0.127: U2_STP4.5@55.223,53.1 56.3,53.1 C7_STP4.1@56.4,53
CPI_STP5: C7_STP5.1 U2_STP5.5 | length 1.2
  Bottom Layer w0.127: U2_STP5.5@16.523,38.4 17.6,38.4 C7_STP5.1@17.7,38.3
CPI_STP6: C7_STP6.1 U2_STP6.5 | length 1.2
  Bottom Layer w0.127: U2_STP6.5@29.423,38.4 30.5,38.4 C7_STP6.1@30.6,38.3
CPI_STP7: C7_STP7.1 U2_STP7.5 | length 1.2
  Bottom Layer w0.127: U2_STP7.5@42.323,38.4 43.4,38.4 C7_STP7.1@43.5,38.3
CPI_STP8: C7_STP8.1 U2_STP8.5 | length 1.2
  Bottom Layer w0.127: U2_STP8.5@55.223,38.4 56.3,38.4 C7_STP8.1@56.4,38.3
CPO_STP1: C7_STP1.2 U2_STP1.4 | length 1.3
  Bottom Layer w0.127: U2_STP1.4@16.523,53.6 17.3,53.6 C7_STP1.2@17.7,54
CPO_STP2: C7_STP2.2 U2_STP2.4 | length 1.3
  Bottom Layer w0.127: U2_STP2.4@29.423,53.6 30.2,53.6 C7_STP2.2@30.6,54
CPO_STP3: C7_STP3.2 U2_STP3.4 | length 1.3
  Bottom Layer w0.127: U2_STP3.4@42.323,53.6 43.1,53.6 C7_STP3.2@43.5,54
CPO_STP4: C7_STP4.2 U2_STP4.4 | length 1.3
  Bottom Layer w0.127: U2_STP4.4@55.223,53.6 56,53.6 C7_STP4.2@56.4,54
CPO_STP5: C7_STP5.2 U2_STP5.4 | length 1.3
  Bottom Layer w0.127: U2_STP5.4@16.523,38.9 17.3,38.9 C7_STP5.2@17.7,39.3
CPO_STP6: C7_STP6.2 U2_STP6.4 | length 1.3
  Bottom Layer w0.127: U2_STP6.4@29.423,38.9 30.2,38.9 C7_STP6.2@30.6,39.3
CPO_STP7: C7_STP7.2 U2_STP7.4 | length 1.3
  Bottom Layer w0.127: U2_STP7.4@42.323,38.9 43.1,38.9 C7_STP7.2@43.5,39.3
CPO_STP8: C7_STP8.2 U2_STP8.4 | length 1.3
  Bottom Layer w0.127: U2_STP8.4@55.223,38.9 56,38.9 C7_STP8.2@56.4,39.3
DEBUG_LED: R10_MCU.1 U1_MCU.69 | length 1.2
  Top Layer w0.254: U1_MCU.69@58.438,27.6 v1(59.6,27.6)
DEBUG_LED_R: D2_MCU.2 R10_MCU.2
DIAG1: U1_MCU.55 U2_STP1.11 | length 2.3
  Top Layer w0.254: U1_MCU.55@58.438,20.6 v1(59.6,20.6)
  Bottom Layer w0.254: v1(14.1,50.053) U2_STP1.11@14.1,51.177
DIAG2: U1_MCU.56 U2_STP2.11 | length 2.7
  Top Layer w0.254: U1_MCU.56@58.438,21.1 v1(60,21.1)
  Bottom Layer w0.254: v1(27,50.053) U2_STP2.11@27,51.177
DIAG3: U1_MCU.57 U2_STP3.11 | length 2.3
  Top Layer w0.254: U1_MCU.57@58.438,21.6 v1(59.6,21.6)
  Bottom Layer w0.254: v1(39.9,50.053) U2_STP3.11@39.9,51.177
DIAG4: U1_MCU.58 U2_STP4.11 | length 2.7
  Top Layer w0.254: U1_MCU.58@58.438,22.1 v1(60,22.1)
  Bottom Layer w0.254: v1(52.8,50.053) U2_STP4.11@52.8,51.177
DIAG5: U1_MCU.59 U2_STP5.11 | length 2.3
  Top Layer w0.254: U1_MCU.59@58.438,22.6 v1(59.6,22.6)
  Bottom Layer w0.254: v1(14.1,35.353) U2_STP5.11@14.1,36.477
DIAG6: U1_MCU.60 U2_STP6.11 | length 2.7
  Top Layer w0.254: U1_MCU.60@58.438,23.1 v1(60,23.1)
  Bottom Layer w0.254: v1(27,35.353) U2_STP6.11@27,36.477
DIAG7: U1_MCU.61 U2_STP7.11 | length 2.3
  Top Layer w0.254: U1_MCU.61@58.438,23.6 v1(59.6,23.6)
  Bottom Layer w0.254: v1(39.9,35.353) U2_STP7.11@39.9,36.477
DIAG8: U1_MCU.62 U2_STP8.11 | length 2.7
  Top Layer w0.254: U1_MCU.62@58.438,24.1 v1(60,24.1)
  Bottom Layer w0.254: v1(52.8,35.353) U2_STP8.11@52.8,36.477
DIR1: U1_MCU.38 U2_STP1.19 | length 2.1
  Top Layer w0.254: v1(50.7,15.7) U1_MCU.38@50.7,16.862
  Bottom Layer w0.254: v1(10.8,54) 10.853,54 10.953,54.1 U2_STP1.19@11.677,54.1
DIR2: U1_MCU.39 U2_STP2.19 | length 2.5
  Top Layer w0.254: v1(51.2,15.3) U1_MCU.39@51.2,16.862
  Bottom Layer w0.254: v1(23.7,54) 23.753,54 23.853,54.1 U2_STP2.19@24.577,54.1
DIR3: U1_MCU.40 U2_STP3.19 | length 2.1
  Top Layer w0.254: v1(51.7,15.7) U1_MCU.40@51.7,16.862
  Bottom Layer w0.254: v1(36.6,54) 36.653,54 36.753,54.1 U2_STP3.19@37.477,54.1
DIR4: U1_MCU.41 U2_STP4.19 | length 2.5
  Top Layer w0.254: v1(52.2,15.3) U1_MCU.41@52.2,16.862
  Bottom Layer w0.254: v1(49.5,54) 49.553,54 49.653,54.1 U2_STP4.19@50.377,54.1
DIR5: U1_MCU.42 U2_STP5.19 | length 2.1
  Top Layer w0.254: v1(52.7,15.7) U1_MCU.42@52.7,16.862
  Bottom Layer w0.254: v1(10.8,39.3) 10.853,39.3 10.953,39.4 U2_STP5.19@11.677,39.4
DIR6: U1_MCU.43 U2_STP6.19 | length 2.5
  Top Layer w0.254: v1(53.2,15.3) U1_MCU.43@53.2,16.862
  Bottom Layer w0.254: v1(23.7,39.3) 23.753,39.3 23.853,39.4 U2_STP6.19@24.577,39.4
DIR7: U1_MCU.44 U2_STP7.19 | length 2.1
  Top Layer w0.254: v1(53.7,15.7) U1_MCU.44@53.7,16.862
  Bottom Layer w0.254: v1(36.6,39.3) 36.653,39.3 36.753,39.4 U2_STP7.19@37.477,39.4
DIR8: U1_MCU.45 U2_STP8.19 | length 2.5
  Top Layer w0.254: v1(54.2,15.3) U1_MCU.45@54.2,16.862
  Bottom Layer w0.254: v1(49.5,39.3) 49.553,39.3 49.653,39.4 U2_STP8.19@50.377,39.4
ENET_100BASETX_RX_N: C8_ENET.1 J1_ENET.4 | length 6.2
  Top Layer w0.127: C8_ENET.1@70.8,32.65 70.592,32.858 cw(c70.884,33.15) 70.471,33.15 70.471,33.65 cw(c70.884,33.65) 70.592,33.942 72.368,35.718 ccw(c71.635,36.45) 72.671,36.45 cw(c73.325,36.45) 72.863,36.913 72.9,36.95 cw(c73.202,36.648) 73.202,37.075 J1_ENET.4@73.75,37.075
ENET_100BASETX_RX_P: C7_ENET.1 J1_ENET.3 | length 6.2
  Top Layer w0.127: C7_ENET.1@69.8,32.65 70.008,32.858 ccw(c69.716,33.15) 70.129,33.15 70.129,33.65 cw(c70.884,33.65) 70.35,34.184 72.126,35.959 ccw(c71.635,36.45) 72.329,36.45 ccw(c71.675,36.45) 72.137,36.913 72.1,36.95 ccw(c71.798,36.648) 71.798,37.075 J1_ENET.3@71.25,37.075
ENET_100BASETX_TX_N: C2_ENET.1 J1_ENET.2 | length 5.6
  Top Layer w0.127: J1_ENET.2@68.75,37.075 68.202,37.075 ccw(c68.202,36.648) 67.9,36.95 67.863,36.913 ccw(c68.325,36.45) 67.671,36.45 67.671,35.87 ccw(c69.62,35.87) 68.242,34.492 cw(c67.688,33.938) 68.471,33.938 68.471,33.05 ccw(c68.642,33.05) 68.521,32.929 C2_ENET.1@68.8,32.65
ENET_100BASETX_TX_P: C1_ENET.1 J1_ENET.1 | length 5.6
  Top Layer w0.127: J1_ENET.1@66.25,37.075 66.798,37.075 cw(c66.798,36.648) 67.1,36.95 67.137,36.913 cw(c66.675,36.45) 67.329,36.45 67.329,35.87 ccw(c69.62,35.87) 68,34.25 cw(c67.688,33.938) 68.129,33.938 68.129,33.05 cw(c67.958,33.05) 68.079,32.929 C1_ENET.1@67.8,32.65
ENET_100M_RD_N: C8_ENET.2 U1_ENET.4 | length 2.3
  Top Layer w0.127: U1_ENET.4@70.55,29.45 70.55,29.702 ccw(c70.28,29.702) 70.471,29.893 70.471,31.15 cw(c70.884,31.15) 70.592,31.442 C8_ENET.2@70.8,31.65
ENET_100M_RD_P: C7_ENET.2 U1_ENET.5 | length 2.3
  Top Layer w0.127: C7_ENET.2@69.8,31.65 70.008,31.442 cw(c69.716,31.15) 70.129,31.15 70.129,29.893 ccw(c70.32,29.702) 70.05,29.702 U1_ENET.5@70.05,29.45
ENET_100M_TD_N: C2_ENET.2 U1_ENET.6 | length 1.6
  Top Layer w0.127: 68.533,31.101 cw(c68.682,31.25) 68.471,31.25 cw(c68.642,31.25) 68.521,31.371 C2_ENET.2@68.8,31.65 ; 69.321,30.313 cw(c68.958,29.95) 69.471,29.95 69.471,29.893 cw(c69.28,29.702) 69.55,29.702 U1_ENET.6@69.55,29.45
ENET_100M_TD_P: C1_ENET.2 U1_ENET.7 | length 2.7
  Top Layer w0.127: C1_ENET.2@67.8,31.65 68.079,31.371 cw(c67.958,31.25) 68.129,31.25 ccw(c68.682,31.25) 68.291,30.859 69.079,30.071 ; U1_ENET.7@69.05,29.45 69.05,29.702 cw(c69.32,29.702) 69.129,29.893 69.129,29.95 ccw(c68.958,29.95) 69.079,30.071
ENET_CEXT: C15_ENET.2 U1_ENET.2 | length 1.6
  Top Layer w0.127: U1_ENET.2@71.55,29.45 71.55,30.2 71.764,30.414 71.964,30.414 C15_ENET.2@72.2,30.65
ENET_LED0: R8_ENET.1 R23_ENET.1 R33_ENET.2 U1_ENET.30 | length 5.4
  Top Layer w0.127: U1_ENET.30@72.7,27.8 72.762,27.739 73.028,27.739 73.6,27.166 v1(73.6,27.15) ; v1(74.3,26.25) 74.317,26.267 74.617,26.267 75.038,26.689 75.038,26.789 75.2,26.95 R8_ENET.1@75.3,26.95
  Bottom Layer w0.127: v1(73.6,27.15) 74.2,26.55 74.2,25.55 ; R33_ENET.2@73.7,25.55 74.2,25.55 ; R23_ENET.1@74.7,25.55 74.2,25.55
ENET_LED0_R: D1_ENET.1 R8_ENET.2 | length 2.9
  Top Layer w0.127: R8_ENET.2@75.3,27.95 75.3,30.55 D1_ENET.1@75.5,30.75
ENET_LED1: R11_ENET.1 R24_ENET.1 R34_ENET.2 U1_ENET.31 | length 4.2
  Top Layer w0.127: U1_ENET.31@72.7,28.3 73.15,28.3 v1(73.6,27.85) 73.6,27.831 74.139,27.291 74.139,27.111 R11_ENET.1@74.3,26.95
  Bottom Layer w0.127: v1(73.6,27.85) 74.6,27.85 R34_ENET.2@74.7,27.95 R24_ENET.1@74.7,28.75
ENET_LED1_R: D2_ENET.1 R11_ENET.2 | length 2.8
  Top Layer w0.127: R11_ENET.2@74.3,27.95 D2_ENET.1@74.3,30.75
ENET_LED2: R22_ENET.1 R32_ENET.2 U1_ENET.28 | length 3
  Top Layer w0.127: U1_ENET.28@72.7,26.8 72.731,26.769 73.081,26.769 73.338,26.512 73.538,26.512 v1(73.6,26.45)
  Bottom Layer w0.127: R32_ENET.2@71.7,26.35 71.8,26.45 v1(73.6,26.45)
ENET_LED3: R20_ENET.1 R30_ENET.2 U1_ENET.29 | length 2.2
  Top Layer w0.127: v1(71.702,27.15) 71.788,27.15 71.938,27.3 U1_ENET.29@72.7,27.3 U1_ENET.29@72.731,27.269
  Bottom Layer w0.127: R30_ENET.2@71.7,27.15 v1(71.702,27.15) R20_ENET.1@72.7,27.15 R20_ENET.1@72.8,27.15
ENET_MDC: R16_ENET.1 U1_ENET.12 U1_MCU.16 | length 6
  Top Layer w0.127: v1(67,27.25) 67.05,27.3 U1_ENET.12@67.9,27.3
  Top Layer w0.254: v1(41.4,23.1) U1_MCU.16@42.962,23.1
  Bottom Layer w0.127: v1(67,27.25) 67.5,27.25 68.8,28.55 69.1,28.55 69.439,28.889 69.439,28.989 69.6,29.15 R16_ENET.1@69.7,29.15
ENET_MDIO: R14_ENET.1 U1_ENET.11 U1_MCU.24 | length 4.8
  Top Layer w0.127: v1(67,27.85) 67.05,27.8 U1_ENET.11@67.9,27.8
  Top Layer w0.161: v1(41.4,19.1) U1_MCU.24@42.962,19.1
  Bottom Layer w0.127: v1(67,27.85) 67.4,27.85 68.439,28.889 68.439,28.989 68.6,29.15 R14_ENET.1@68.7,29.15
ENET_MODESELECT: R26_ENET.1 R36_ENET.2 U1_ENET.1 | length 2.3
  Top Layer w0.127: U1_ENET.1@72.05,29.45 v1(72.7,29.45)
  Bottom Layer w0.127: R36_ENET.2@71.7,30.05 R26_ENET.1@72.7,30.05 R26_ENET.1@72.7,30 ; v1(72.7,29.45) 72.7,29.95 R26_ENET.1@72.75,30
ENET_RBIAS: R12_ENET.2 U1_ENET.10 | length 1.7
  Top Layer w0.127: R12_ENET.2@66.2,28.25 66.25,28.3 U1_ENET.10@67.9,28.3
ENET_RST_L: R1_ENET.1 U1_ENET.32 U1_MCU.15 | length 2.2
  Top Layer w0.254: v1(41.8,23.6) U1_MCU.15@42.962,23.6 ; U1_ENET.32@72.7,28.8 73.597,28.8 73.647,28.75 v1(73.7,28.75)
ENET_STRAP7: R17_ENET.1 R27_ENET.2 U1_ENET.13 | length 2.5
  Top Layer w0.127: U1_ENET.13@67.9,26.8 67.925,26.825 68.475,26.825 v1(68.5,26.85)
  Bottom Layer w0.127: v1(68.5,26.85) 68.587,26.85 68.687,26.95 R17_ENET.1@70.3,26.95
ENET_STRAP8: R18_ENET.1 R28_ENET.2 U1_ENET.14 | length 2.5
  Top Layer w0.127: U1_ENET.14@67.9,26.3 67.925,26.275 68.475,26.275 v1(68.5,26.25)
  Bottom Layer w0.127: v1(68.5,26.25) 68.587,26.25 68.687,26.15 R18_ENET.1@70.3,26.15
ENET_XI_25MHZ_CLK: C13_ENET.2 U1_ENET.9 Y1_ENET.3 | length 4
  Top Layer w0.127: C13_ENET.2@65.2,28.25 65.266,28.316 65.266,28.666 65.714,29.114 65.814,29.114 66.3,29.6 Y1_ENET.3@66.3,29.7 67,29.7 67.694,29.006 67.694,28.862 67.756,28.8 U1_ENET.9@67.9,28.8
ENET_XO_25MHZ_CLK: C14_ENET.2 U1_ENET.8 Y1_ENET.1 | length 9.6
  Top Layer w0.127: C14_ENET.2@64.2,28.25 63.6,28.85 63.6,31.1 63.913,31.414 64.013,31.414 Y1_ENET.1@64.5,31.9 ; Y1_ENET.1@64.5,32 Y1_ENET.1@64.5,31.9 ; U1_ENET.8@68.55,29.45 68.55,29.594 68.489,29.656 67.894,29.656 66.7,30.85 65.65,30.85 65.087,31.414 64.987,31.414 Y1_ENET.1@64.5,31.9
FLASH1: J2.1 U1_MCU.7 | length 1.2
  Top Layer w0.254: v1(41.8,27.6) U1_MCU.7@42.962,27.6
FLASH2: J2.2 U1_MCU.18 | length 1.6
  Top Layer w0.254: v1(41.4,22.1) U1_MCU.18@42.962,22.1